# Altium PCB OGS_ASIC_RFPOWERING.PcbDoc
Units mil, origin at the board's own origin, x right, y up, seen from the top; angles counter-clockwise.
Board outline 618 x 378 mil, 2 copper layers (Top Layer, Bottom Layer), stack 7.7 mil thick; 23 components, 22 nets, 78 pads, 9 vias.
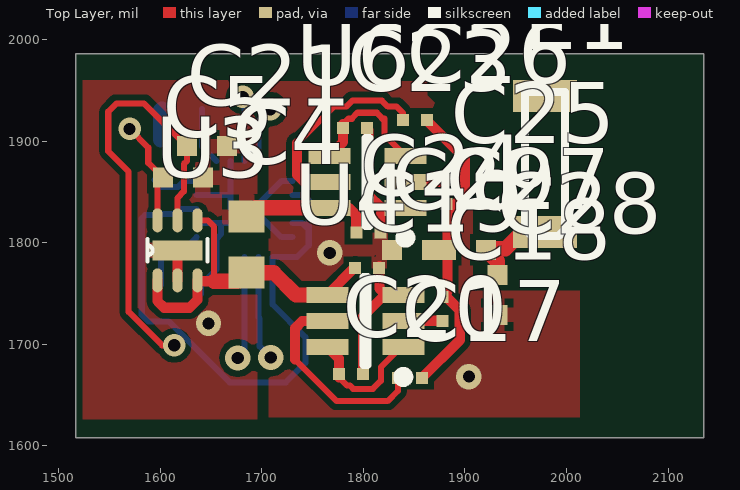
[diagram p0: Top Layer view]
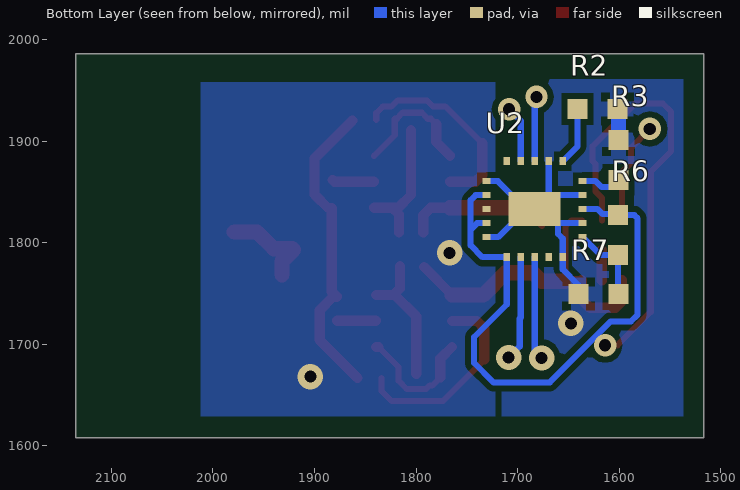
[diagram p1: Bottom Layer view, seen from below]

## Layer stack, top to bottom
Top Layer: signal copper 2.1
Dielectric: core 3.5, FR-4, Dk 4.8
Bottom Layer: signal copper 2.1

## Board outline
1517,1608 1517,1986 2135,1986 2135,1608

## Design rules (kind name [scope] priority, off if disabled: settings)
Clearance clearance1 [All] p1: gap=6
ComponentClearance [All] p1: gap=6 collisioncheckmode=3 verticalgap=0 showdistances=TRUE
Height [All] p1 off: minheight=0 maxheight=1000 prefheight=500
HoleSize [All] p1: absolutevalues=TRUE maxlimit=100 minlimit=10 maxpercent=80.000 minpercent=20.000
HoleToHoleClearance [All] p1: gap=6 allowstackedmicrovias=TRUE
MinimumSolderMaskSliver [All] p1: minsoldermaskwidth=3
PlaneClearance [All] p1: clearance=10
PlaneConnect [All] p1: planeconnectstyle=Direct reliefexpansion=20 reliefentries=4 reliefconductorwidth=10 reliefairgap=10
PolygonConnect PowerConnect [All vs Not OnOutside] p1: connectstyle=Direct reliefconductorwidth=10 reliefentries=4 polygonreliefangle="90 Angle"
PolygonConnect [All] p2: connectstyle=Relief reliefconductorwidth=15 reliefentries=4 polygonreliefangle="90 Angle"
RoomDefinition RF_POWER [InComponentClass('RF_POWER')] p1: confinementstyle=ConfineIn formatcopy=TRUE lockcomponents=FALSE outline 0,0 2000,0 2000,1000 0,1000
RoomDefinition SingleASIC [InComponentClass('SingleASIC')] p2 off: confinementstyle=ConfineIn formatcopy=TRUE lockcomponents=FALSE outline 2187,484 3662,484 3662,699 2187,699
RoutingCorners [All] p1: cornerstyle=45-Degree minsetback=20 maxsetback=20
RoutingVias [All] p1: holewidth=12 width=22 viastyle="Through Hole" minholewidth=12 minwidth=22 maxholewidth=30 maxwidth=50
SilkscreenOverComponentPads [OnLayer('Mechanical 13') vs OnLayer('Mechanical 15')] p1: minsilkscreentomaskgap=10
SolderMaskExpansion [All] p1: expansion=0
Width Width_v3p0 [InNet('V3P0')] p1: maxlimit=50 minlimit=6 preferedwidth=10
Width [All] p2: maxlimit=100 minlimit=6 preferedwidth=6
19 further rules are at their usual default settings.

## Classes and differential pairs
component class SingleASIC: R2 R3 R6 R7 U2
component class RF_POWER: C4 C5 C17 C18 C19 C20 C21 C23 C24 C25 C26 C27 C28 C29 E1 U3 U4 U6

## Components (designator, comment, footprint, x,y, rotation, side; value= is the part's Value field where it differs from the comment)
C4 "NP0 50V" 1608[0603] 1685,1798 r90 top
C5 "NP0 50V" 0402l 1622.66,1864 r0 top
C17 "NP0 50V" 0201 1846,1667 r0 top
C18 "NP0 50V" 0201 1878,1735 r270 top
C19 "NP0 50V" 0201 1803.81,1775 r0 top
C20 "NP0 50V" 0201 1788,1671 r180 top
C21 "NP0 50V" 0402l 1646,1895 r0 top
C23 "NP0 50V" 0201 1792,1913 r180 top
C24 "NP0 50V" 0201 1805,1810 r0 top
C25 "NP0 50V" 0201 1882,1850 r270 top
C26 "NP0 50V" 0201 1851,1921 r0 top
C27 "NP0 50V" 0402l 1901,1793 r0 top
C28 "NP0 50V" 0402l 1932,1748.69 r270 top
C29 "NP0 50V" 0402l 1848,1793 r180 top
E1 "MicroAntenna" 2450AT18B100 1979,1877.57 r270 top
R2 "Res2" 0402L 1621.47,1931.55 r180 bottom
R3 "Res2" 0402L 1600.79,1881.55 r90 bottom
R6 "Res2" 0402L 1601.11,1807.55 r90 bottom
R7 "Res2" 0402L 1620.47,1749.55 r180 bottom
U2 "Single_ASIC" Single_ASIC 1730.49,1860.56 r180 bottom
U3 "mic5320" MLF-6 1597.51,1763 r90 top
U4 "HSMS-286R" SOT363-6M 1802.01,1722.97 r180 top
U6 "HSMS-286R" SOT363-6M 1804,1860 r180 top

## Footprints (in the part's own frame and the unit in brackets; to place one, negate y for a bottom-side part, rotate by r counter-clockwise, add the part's x,y. Pads: shape width x height; smd on the part's side, far side on the other; paste and mask are expansions set on the pad)
0201 [mm]
  rect 0.3x0.3 smd: 1(-0.3,0) 2(0.3,0)
  body extent -0.3,-0.15 0.3,0.15, height 0.3
0402l [mm]
  rect 0.5x0.5 smd: 1(-0.5,0) 2(0.5,0)
  body extent -0.5,-0.25 0.5,0.25, height 0.3
0402L [mm]
  rect 0.5x0.5 smd: 1(-0.5,0) 2(0.5,0)
  body extent -0.5,-0.25 0.5,0.25, height 0.3
1608[0603] [mm] "Chip Capacitor, Body 1.6x0.8mm, IPC High Density"
  rect 0.8x0.9 smd: 1(-0.7,0) 2(0.7,0)
  body extent -0.87,-0.48 0.87,0.48, height 1.3
2450AT18B100 [mm]
  rect 0.8x1.6 smd: 1(1.7,0) 2(-1.7,0)
  silkscreen extent -1.8,-0.5 1.8,0.5
MLF-6 [mm]
  oval 0.6x0.25 smd: 1(0,0) 2(0,-0.5) 3(0,-1) 4(1.5,-1) 5(1.5,-0.5) 6(1.5,0)
  rect 0.5x1.26 smd: 1(0.75,-0.5)
  silkscreen extent 0.47,-1.25 1.03,0.25
Single_ASIC [mm]
  rect 0.152x0.2 smd: 1(0.5,0.5) 2(0.85,0.5) 3(1.2,0.5) 4(1.55,0.5) 5(1.9,0.5) 11(1.9,-1.9) 12(1.55,-1.9) 13(1.2,-1.9) 14(0.85,-1.9) 15(0.5,-1.9)
  rect 0.2x0.152 smd: 6(2.4,0) 7(2.4,-0.35) 8(2.4,-0.7) 9(2.4,-1.05) 10(2.4,-1.4) 16(0,-1.4) 17(0,-1.05) 18(0,-0.7) 19(0,-0.35) 20(0,0)
  rect 1.3x0.85 smd: 21(1.2,-0.7)
SOT363-6M [mm]
  rect 1.05x0.4 smd: 1(-0.95,0.65) 2(-0.95,0) 3(-0.95,-0.65) 4(0.95,-0.65) 5(0.95,0) 6(0.95,0.65)
  silkscreen extent -1.07,-1.1 0.05,1.52, body extent -0.7,-1.1 0.7,1.1

## Part data
C4 C5 C17 C18 C19 C20 C21 C23 C24 C25 C26 C27 C28 C29: library part Cap, "Capacitor"
R2 R3 R6 R7: "Resistor"

## Via types
v1: diameter 25, hole 12, Top Layer to Bottom Layer, 5 vias
v2: diameter 22, hole 12, Top Layer to Bottom Layer, 4 vias

## Nets (pads, with @x,y where several pads share a name; then routed paths per layer and width w, separated by ;. In a path a pad name is that pad's centre, name@x,y a point inside that pad or via, vN(x,y) a via of type N, cw(c..) or ccw(c..) an arc to the next point about the centre after c; other vN are vias at no path point)
ADC+: 
ADC-: 
ELEC: U2.3 | length 64
  Bottom Layer w6: v2(1681.47,1943.55) 1683.24,1941.78 U2.3
ELEC_REF: U2.2 | length 55.9
  Bottom Layer w6: U2.2 1697.02,1919.96 v2(1708.47,1931.41)
GND: C4.2 C5.2 C21.2 C24.1 R2.2 R3.2 R7.1 U2.4 U2.7 U2.9 U2.11 U2.16 U2.20 U2.21 U3.1@1617.2,1792.53 U3.2 U6.6 | length 538.8
  Top Layer w6: C4.2@1676.13,1816.68 C4.2
  Top Layer w10: U3.2 U3.1@1617.2,1792.53 ; U6.6 1785.59,1834.41 1793,1827 1793,1810.19 C24.1
  Top Layer w15: C4.2 1693.85,1834.41 U6.6
  Bottom Layer w6: U2.9 U2.21@1660.15,1819.22 ; U2.7 U2.21@1669.46,1846.78 ; R7.1 1640.16,1758.23 1655.68,1773.76 U2.11 1655.68,1804.09 1660.15,1808.56 U2.21@1660.15,1819.22 ; U2.4 U2.21@1669.46,1846.78 ; U2.16 1719.33,1805.44 U2.21@1691.77,1833 ; U2.20 1719.49,1860.56 1691.93,1833 U2.21@1691.77,1833 ; U2.21@1660.15,1819.22 1669.46,1819.22 U2.21 ; U2.21@1669.46,1846.78 1669.46,1833 U2.21 ; U2.21 U2.21@1691.77,1833
  Bottom Layer w15: R3.2 1600.79,1930.55 R2.2
  other v1: 1647.66,1720.55
NetC17_1: C17.1 U4.5 | length 200.7
  Top Layer w6: 1732.93,1684.98 1773.81,1644.09 1823.95,1644.09 1834.19,1654.33 C17.1
  Top Layer w10: 1732.93,1684.98 1732.93,1715.93 1740,1723 U4.5
NetC17_2: C17.2 C18.1 C25.2 C26.2 C27.1 C29.1 | length 305.2
  Top Layer w6: C26.2@1862.81,1920.19 C26.2
  Top Layer w10: C17.2 1894.91,1704.09 1894.91,1733.65 1881.75,1746.81 C18.1 1883,1751.81 1883,1834.19 1886.75,1834.19 1899.91,1847.35 1899.91,1883.09 C26.2@1862.81,1920.19
NetC18_2: C18.2 U4.2 | length 38.7
  Top Layer w10: U4.2 1839.59,1723.19 C18.2
NetC20_2: C20.2 U4.1 U4.6 | length 127.8
  Top Layer w6: C20.2@1776.19,1667.25 1784.16,1659.28 1786.99,1659.28 1790.18,1656.09 1809.44,1656.09 1817.28,1663.93 1817.28,1677.46 U4.1@1837.23,1697.41
  Top Layer w10: U4.6 1776.19,1685.82 C20.2 C20.2@1776.19,1667.25 ; U4.1@1837.23,1697.41 U4.1
NetC23_2: C23.2 U6.3 U6.4 | length 130.3
  Top Layer w6: C23.2@1780.19,1916.75 1785.44,1922 1788.91,1922 1788.91,1922.63 1794.18,1927.91 1813.44,1927.91 1818.72,1922.63 1818.72,1922 1821,1922 1821,1905.99 U6.3
  Top Layer w10: U6.4 1780.19,1899.18 C23.2 C23.2@1780.19,1916.75
NetC25_1: C25.1 U6.2 | length 41.3
  Top Layer w10: U6.2 1880.19,1860 C25.1
NetC26_1: C26.1 U6.5 | length 199.1
  Top Layer w6: 1734.93,1898.02 1770.91,1934 1783.3,1934 1789.21,1939.91 1818.41,1939.91 1824.32,1934 1832.81,1934 1839.19,1927.62 C26.1
  Top Layer w10: 1734.93,1898.02 1734.93,1866.72 1741.65,1860 U6.5
NetC27_2: C27.2 C28.1 E1.1 | length 94.9
  Top Layer w15: C28.1 1932,1781.68 C27.2 1921.76,1794.07 1940,1794.07 1956.57,1810.64 E1.1
NetR2_1: R2.1 U2.5 | length 57.3
  Bottom Layer w6: R2.1 1641.3,1931.41 1641.3,1894.63 U2.5
NetR3_1: R3.1 U2.6 | length 46.9
  Bottom Layer w6: R3.1@1594.47,1861.87 1601.59,1854.75 1617.49,1854.75 1623.3,1860.56 U2.6
NetR6_1: R6.1 R7.2 U2.10 | length 71.4
  Bottom Layer w6: R7.2@1601.11,1758.6 R6.1 1618.43,1787.87 U2.10
NetR8_2: U2.14 | length 103.7
  Bottom Layer w6: U2.14 1697.02,1726.55 1697.97,1725.6 1697.97,1698.03 v1(1709,1687)
NetR9_2: U2.13 | length 102
  Bottom Layer w6: v1(1676.47,1686.55) 1683.24,1693.32 U2.13
V1P5: C21.1 R6.2 U2.8 U2.15 U2.17 U2.19 U3.5 | length 1026.2
  Top Layer w6: v2(1614,1699) 1602,1699 1569,1732 1569,1870 1549,1890 1549,1929 1557,1937 1584.32,1937 C21.1 1626.32,1880.39 1623.5,1877.57 1623.5,1850.43 1617.2,1844.13 U3.5
  Bottom Layer w6: R6.2 1585.16,1827.24 1581.94,1824.03 1581.94,1729.08 1588.47,1722.55 1608.47,1722.55 1668.47,1662.55 1723.89,1662.55 1743,1681.66 1743,1707 1710.8,1739.2 U2.15 1734.76,1785.76 1746.32,1797.32 1746.32,1812.73 ; R6.2@1601.11,1828.18 1616.49,1828.18 1621.31,1833 U2.8 ; U2.17 1739.83,1819.22 1746.32,1812.73 ; U2.19 1741.34,1846.78 1746.32,1841.8 1746.32,1812.73
V3P3: C5.1 U3.6 | length 105.9
  Top Layer w6: v2(1570,1912) 1588.34,1893.66 1588.34,1878.64 C5.1 1597.51,1858.54 U3.6
VIRTUALGND: C19.2 C20.1 C23.1 C24.2 C28.2 C29.2 U4.3 U6.1 | length 268.7
  Top Layer w10: C20.1 1799.81,1727.51 1820.89,1748.59 U4.3@1822.41,1748.59 ; C23.1@1805,1911 1805,1847 1817.59,1834.41 U6.1@1823.41,1834.41 ; C19.2@1815.81,1777 1815.81,1755.19 U4.3@1822.41,1748.59 ; C24.2 1816.81,1827.81 U6.1@1823.41,1834.41 ; U4.3 U4.3@1822.41,1748.59 ; U6.1 U6.1@1823.41,1834.41
  other v1: 1904,1668.2 1767,1790
VRFPOWER: C4.1 C19.1 U3.1@1597.51,1763 U3.3 U3.4 U4.4 | length 337.3
  Top Layer w6: U3.4 1646.94,1822.06 1653,1816 1653,1762
  Top Layer w10: U3.1@1597.51,1763 1597.51,1742.49 1604.05,1735.95 1628.95,1735.95 1636.88,1743.88 U3.3 1637.88,1762 1653,1762 ; U4.4 C19.1@1792.19,1776.18
  Top Layer w15: 1653,1762 1676.56,1762 C4.1 1711.88,1770.44 1733.75,1748.57 U4.4
pads on no net: E1.2 U2.1 U2.12 U2.18

## Polygon pours and split planes (outlines as drawn)
VIRTUALGND on Top Layer "top-vGND" (solid, pour order 8): 1707,1959 2013,1959 2013,1628 1707,1628
GND on Top Layer "top-GND" (solid, pour order 6): 1524,1960 1524,1626 1696,1626 1695.63,1626 1695.63,1960
VIRTUALGND on Bottom Layer "bottom-GND" (solid, pour order 7): 1722,1958 2012,1958 2012,1629 1722,1629
GND on Bottom Layer "top-GND" (solid, pour order 5): 1537,1961 1537,1629 1716,1629 1715.61,1629 1715.61,1961

## Other copper
Top Layer:
  pour cut-out: 2016,1966 2016,1752.54 1908,1752.54 1908,1900 1862.81,1945.19 1862.81,1966

## Silkscreen, mask and mechanical layers (free items; w line width, h text height)
Mechanical 2:
  the board outline again, w10